# Altium PCB PCB1.PcbDoc (part 3 of 3)
Units mm, origin at the board's own origin, x right, y up, seen from the top; angles counter-clockwise.
Board outline 93.85 x 63.5 mm, 4 copper layers (Top Layer, Mid Layer 1, Mid Layer 2, Bottom Layer), stack 1.65 mm thick; 77 components, 56 nets, 298 pads, 141 vias.
Unrouted connection lines stored in the file: 1.
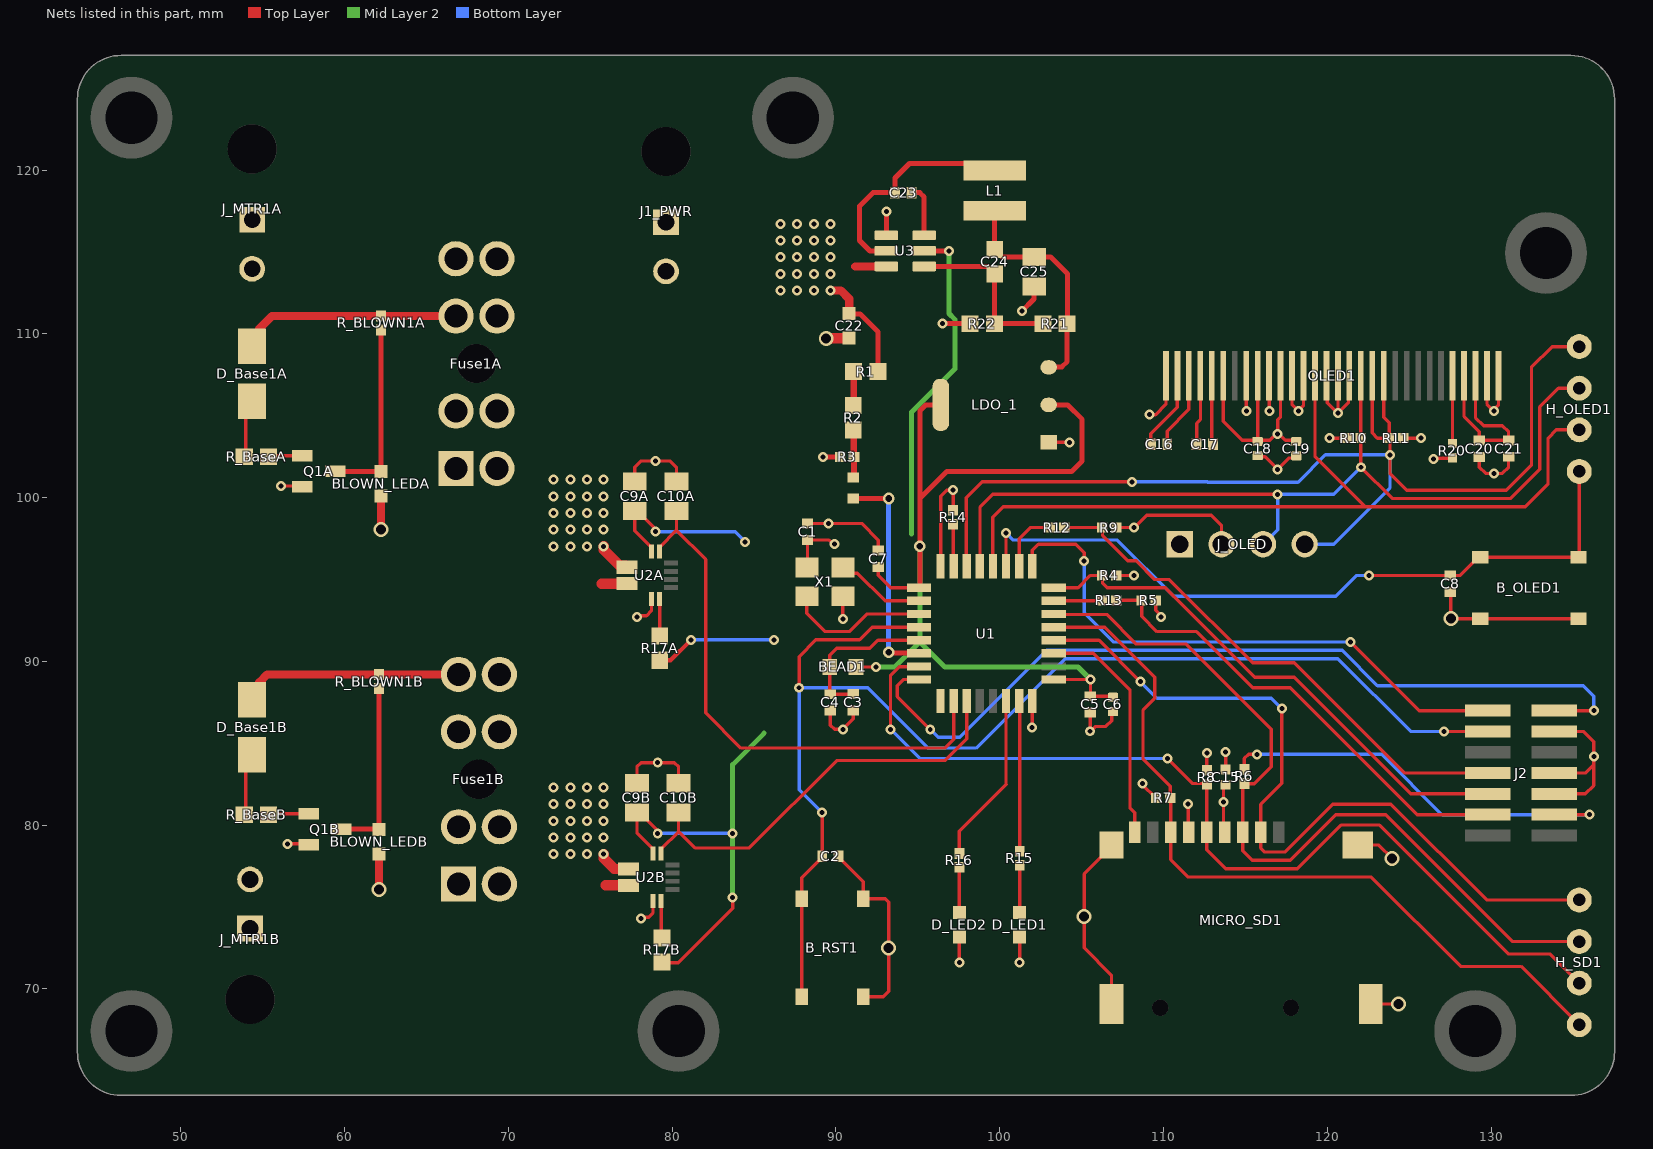
[diagram p4: the nets of this part, all layers, seen from the top]

## Part data (continued)
R17A R17B: library part 0603WAF1001T5E, "Resistor, 1kΩ, ±1%, 100mW, 75V, ±100ppm/℃, -55℃~+155℃, SMD 0603", JLCPCB Basic Part=Yes, JLCPCB Part Number=C21190, Manufacturer=Uniroyal, Package Size=0603, Power Rating=100mW, Resistance=1kΩ, Temperature Coefficient=±100ppm/℃, Temperature Rating=-55℃~+155℃, Tolerance=±1%, Voltage Rating=75V, Category=Resistors, ComponentLink1Description=Datasheet, ComponentLink1URL=https://wmsc.lcsc.com/wmsc/upload/file/pdf/v2/lcsc/2206010130_UNI-ROYAL-Uniroyal-Elec-0603WAF1001T5E_C21190.pdf, ComponentLink2Description="JLCPCB Part URL", ComponentLink2URL=https://jlcpcb.com/partdetail/C21190, Manufacturer Part Number=0603WAF1001T5E, Supplier 1=LCSC, Supplier Part Number 1=C21190
R20: library part 0402WGF3903TCE, "390k Resistor", JLCPCB Part Class="Extended Part", LCSC Part Name="390kΩ ±1% 62.5mW 厚膜电阻", Manufacturer=UNI-ROYAL(厚声), Operating Temperature Range=-55℃~+155℃, Temperature Coefficient=±100ppm/℃, Tolerance=±1%, Add into BOM=yes, Convert to PCB=yes, Datasheet=https://atta.szlcsc.com/upload/public/pdf/source/20200306/C422600_1E6D84923E4A46A82E41ADD87F860B5C.pdf, Device=0402WGF3903TCE, Manufacturer Part=0402WGF3903TCE, Supplier=LCSC, Supplier Footprint=0402, Supplier Part=C25782, Symbol=0402WGF3903TCE, Type="Thick Film Resistors"
R21: "100 kOhms Â±1% 0.1W, 1/10W Chip Resistor 0603 (1608 Metric) Moisture Resistant Thick Film", Package="0603 Yageo", Check_prices=https://www.snapeda.com/parts/RC0603FR-07100KL/Yageo/view-part/?ref=eda, MF=Yageo, MP=RC0603FR-07100KL, SnapEDA_Link=https://www.snapeda.com/parts/RC0603FR-07100KL/Yageo/view-part/?ref=snap
R22: "Resistor, 13kΩ, ±1%, 100mW, 75V, ±100ppm/℃, -55℃~+155℃, SMD 0603", JLCPCB Basic Part=Yes, JLCPCB Part Number=C22797, Manufacturer=Uniroyal, Package Size=0603, Power Rating=100mW, Resistance=13kΩ, Temperature Coefficient=±100ppm/℃, Temperature Rating=-55℃~+155℃, Tolerance=±1%, Voltage Rating=75V, Category=Resistors, ComponentLink1Description=Datasheet, ComponentLink1URL=https://wmsc.lcsc.com/wmsc/upload/file/pdf/v2/lcsc/2206010130_UNI-ROYAL-Uniroyal-Elec-0603WAF1302T5E_C22797.pdf, ComponentLink2Description="JLCPCB Part URL", ComponentLink2URL=https://jlcpcb.com/partdetail/C22797, Manufacturer Part Number=0603WAF1302T5E, Supplier 1=LCSC, Supplier Part Number 1=C22797
R_BaseA R_BaseB: "Resistor, 10kΩ, ±1%, 100mW, 75V, ±100ppm/℃, -55℃~+155℃, SMD 0603", JLCPCB Basic Part=Yes, JLCPCB Part Number=C25804, Manufacturer=Uniroyal, Package Size=0603, Power Rating=100mW, Resistance=10kΩ, Temperature Coefficient=±100ppm/℃, Temperature Rating=-55℃~+155℃, Tolerance=±1%, Voltage Rating=75V, Category=Resistors, ComponentLink1Description=Datasheet, ComponentLink1URL=https://wmsc.lcsc.com/wmsc/upload/file/pdf/v2/lcsc/2206010045_UNI-ROYAL-Uniroyal-Elec-0603WAF1002T5E_C25804.pdf, ComponentLink2Description="JLCPCB Part URL", ComponentLink2URL=https://jlcpcb.com/partdetail/C25804, Manufacturer Part Number=0603WAF1002T5E, Supplier 1=LCSC, Supplier Part Number 1=C25804
R_BLOWN1A R_BLOWN1B: "Resistor, 12kΩ, ±1%, 62.5mW, 50V, ±100ppm/℃, -55℃~+155℃, SMD 0402", JLCPCB Basic Part=Yes, JLCPCB Part Number=C25752, Manufacturer=Uniroyal, Package Size=0402, Power Rating=62.5mW, Resistance=12kΩ, Temperature Coefficient=±100ppm/℃, Temperature Rating=-55℃~+155℃, Tolerance=±1%, Voltage Rating=50V, Category=Resistors, ComponentLink1Description=Datasheet, ComponentLink1URL=https://wmsc.lcsc.com/wmsc/upload/file/pdf/v2/lcsc/2206010100_UNI-ROYAL-Uniroyal-Elec-0402WGF1202TCE_C25752.pdf, ComponentLink2Description="JLCPCB Part URL", ComponentLink2URL=https://jlcpcb.com/partdetail/C25752, Manufacturer Part Number=0402WGF1202TCE, Supplier 1=LCSC, Supplier Part Number 1=C25752
U1: "No Description Available", Mfr_Name=STMicroelectronics, RefDes=RefDes, Type=Type
U2A U2B: "Current Sensor 15.5A 1 Channel Hall Effect, Open Loop Bidirectional 12-PowerWFQFN", Package="PowerWFQFN-12 Allegro MicroSystems LLC", Check_prices=https://www.snapeda.com/parts/ACS711KEXLT-15AB-T/Allegro/view-part/?ref=eda, MF="Allegro MicroSystems LLC", MP=ACS711KEXLT-15AB-T, SnapEDA_Link=https://www.snapeda.com/parts/ACS711KEXLT-15AB-T/Allegro/view-part/?ref=snap
U3: "4.5V to 17V Input, 1A Synchronous Step-Down Voltage Regulator in 6-pin SOT-23", Package="SOT-23-THN-6 Texas Instruments", Check_prices=https://www.snapeda.com/parts/TPS561201DDCT/Texas+Instruments/view-part/?ref=eda, MF="Texas Instruments", MP=TPS561201DDCT, SnapEDA_Link=https://www.snapeda.com/parts/TPS561201DDCT/Texas+Instruments/view-part/?ref=snap
X1: library part SX3M32.768KM20F30TNN, Current - Supply=90uA, Frequency Stability=±30ppm, JLCPCB Part Class="Extended Part", LCSC Part Name="32.768kHz ±20ppm 1.62V~3.63V CMOS", Manufacturer=SCTF(星通时频), Normal temperature Frequency Tolerance=±20ppm, Operating Temperature=-40℃~+85℃, Voltage - Supply=1.62V~3.63V, Add into BOM=yes, Convert to PCB=yes, Datasheet=https://atta.szlcsc.com/upload/public/pdf/source/20240605/38A6F081BC26201D4BADAAB4D2EED01C.pdf, Device=SX3M32.768KM20F30TNN, Manufacturer Part=SX3M32.768KM20F30TNN, Output Type=CMOS, Supplier=LCSC, Supplier Footprint=SMD3225-4P, Supplier Part=C2901582, Symbol=SX3M32.768KM20F30TNN

## Free pads (board coordinates)
  rect 0.7x0.6 smd: 3(91.059,99.949) 3(91.059,101.219)
  round 5 hole 3.2 unplated paste-2539.97 mask+0: 4(46.99,67.437) 4(46.99,123.19) 4(80.391,67.437) 4(87.376,123.19) 4(129.032,67.437) 4(133.35,114.935)

## Via types
v1: diameter 0.61, hole 0.305, Top Layer to Bottom Layer, 130 vias
v2: diameter 0.914, hole 0.61, Top Layer to Bottom Layer, 8 vias
v3: diameter 0.711, hole 0.406, Top Layer to Bottom Layer, 3 vias

## Nets (pads, with @x,y where several pads share a name; then routed paths per layer and width w, separated by ;. In a path a pad name is that pad's centre, name@x,y a point inside that pad or via, vN(x,y) a via of type N, cw(c..) or ccw(c..) an arc to the next point about the centre after c; other vN are vias at no path point)
3V3: C1.2 C9A.2 C9B.2 C15.1 C18.2 C19.2 J2.3 J_OLED.2 MICRO_SD1.4 OLED1.6 OLED1.9 OLED1.11 R4.2 R5.2 R6.2 R7.2 R8.2 R9.2 R10.2 R11.2 R17A.2 R17B.2 U2A.12 U2B.12 U3.5 X1.4 | length 126.8
  Top Layer w0.203: U2A.12@78.736,96.7 78.736,96.975 77.724,97.987 C9A.2@77.724,99.176 77.899,99.176 78.916,98.159 78.916,97.995 v1(78.994,97.917) ; U2B.12@78.828,78.277 78.828,78.552 77.851,79.529 C9B.2@77.851,80.761 78.026,80.761 79.043,79.744 79.043,79.58 v1(79.121,79.502) ; R17B.2@79.609,71.608 80.371,71.608 83.693,74.93 v1(83.693,75.59) ; X1.4@88.224,95.73 88.265,95.771 C1.2@88.265,97.417 ; C1.2@88.269,97.413 89.548,97.413 89.806,97.155 v1(89.916,97.155) ; R4.2@107.105,95.25 v1(108.204,95.25) ; R9.2@107.105,98.171 v1(108.204,98.171) 108.966,98.933 112.911,98.933 113.538,98.306 J_OLED.2@113.538,97.155 ; v1(108.712,82.55) 108.712,82.481 109.532,81.661 R7.2@109.557,81.661 ; R5.2@109.518,93.726 109.518,93.121 109.855,92.784 v1(109.855,92.71) ; R8.2@112.649,83.356 v1(112.649,84.397) ; OLED1.6@113.647,107.442 113.647,104.666 114.816,103.497 115.745,103.497 116.486,103.497 116.867,103.878 v1(116.967,103.878) ; MICRO_SD1.4@113.738,79.564 113.665,79.637 113.665,82.344 C15.1@113.792,82.471 ; R6.2@114.935,83.4 114.935,84.074 115.189,84.328 v1(115.697,84.328) ; C18.2@115.747,103.499 OLED1.9@115.747,107.442 ; OLED1.11@117.147,107.442 117.147,104.938 116.967,104.758 v1(116.967,103.878) ; C19.2@118.11,103.489 118.106,103.493 117.444,103.493 117.059,103.878 v1(116.967,103.878) ; v1(120.142,103.632) R10.2@121.197,103.632 ; R11.2@124.631,103.632 v1(125.73,103.632) ; J2.3@133.861,80.645 v1(136.017,80.645)
  Top Layer w0.254: R17A.2@79.248,90.07 79.91,90.07 v1(81.153,91.313)
  Top Layer w0.305: U3.5@95.389,115.062 v1(96.901,115.062)
  Mid Layer 2 w0.305: v1(83.693,75.59) v1(83.693,79.502) 83.693,83.693 85.619,85.619 ; 94.615,97.79 94.615,105.214 97.257,107.856 97.257,110.884 96.901,111.24 v1(96.901,115.062)
  Bottom Layer w0.203: v1(78.994,97.917) 83.847,97.917 84.455,97.309 v1(84.455,97.282) ; v1(79.121,79.502) v1(83.693,79.502) ; v1(81.153,91.313) v1(86.233,91.313) ; v1(115.697,84.328) 123.317,84.328 127,80.645 v1(136.017,80.645)
  other v1: 113.665,81.407
26V1: C22.2 J1_PWR.1 R1.2 U2A.1 U2B.1 U3.3 | length 12.9
  Top Layer w0.305: C22.2@90.805,111.24 90.837,111.208 91.484,111.208 92.583,110.109 R1.2@92.583,107.696
  Top Layer w0.508: v1(89.662,112.649) 90.297,112.649 90.805,112.141 C22.2@90.805,111.24 ; 91.186,114.112 U3.3@93.079,114.112 U3.3@93.084,114.112
  Top Layer w0.635: v1(75.819,78.232) 75.819,77.978 76.47,77.327 U2B.1@77.343,77.327 ; v1(75.819,97.028) 75.819,96.809 76.796,95.833 77.168,95.833 U2A.1@77.251,95.75
  other v1: 72.771,78.232 73.787,78.232 74.803,78.232 72.771,79.248 73.787,79.248 74.803,79.248 75.819,79.248 72.771,80.264 73.787,80.264 74.803,80.264 75.819,80.264 72.771,81.28 73.787,81.28 74.803,81.28 75.819,81.28 72.771,82.296 73.787,82.296 74.803,82.296 75.819,82.296 72.771,97.028 73.787,97.028 74.803,97.028 72.771,98.044 73.787,98.044 74.803,98.044 75.819,98.044 72.771,99.06 73.787,99.06 74.803,99.06 75.819,99.06 72.771,100.076 73.787,100.076 74.803,100.076 75.819,100.076 72.771,101.092 73.787,101.092 74.803,101.092 75.819,101.092 86.614,112.649 87.63,112.649 88.646,112.649 86.614,113.665 87.63,113.665 88.646,113.665 89.662,113.665 86.614,114.681 87.63,114.681 88.646,114.681 89.662,114.681 86.614,115.697 87.63,115.697 88.646,115.697 89.662,115.697 86.614,116.713 87.63,116.713 88.646,116.713 89.662,116.713
\C\S\: H_SD1.4 MICRO_SD1.2 U1.20 | length 47.9
  Top Layer w0.203: U1.20@103.302,91.294 106.064,91.294 v1(108.585,88.773) ; v1(117.221,87.122) 117.221,82.55 115.938,81.267 MICRO_SD1.2@115.938,79.564 115.938,78.605 116.184,78.359 117.408,78.359 120.329,81.28 123.885,81.28 129.727,75.438 H_SD1.4@135.382,75.438
  Bottom Layer w0.203: v1(108.585,88.773) 109.601,87.757 116.586,87.757 v1(117.221,87.122)
ADC1_IN8: U1.9
AVDD: BEAD1.2 C3.2 C4.2 U1.5 | length 9.6
  Top Layer w0.203: C3.2@91.059,88.003 91.055,87.999 89.666,87.999 C4.2@89.662,87.995 89.624,88.033 BEAD1.2@89.624,89.662 89.624,90.386 90.043,90.805 92.075,90.805 92.564,91.294 U1.5@95.072,91.294
BOOT0: R14.2 U1.31 | length 2.6
  Top Layer w0.203: R14.2@97.155,98.381 97.155,95.841 U1.31@97.187,95.809
CardDetect: MICRO_SD1.CD1 U1.19 | length 14.4
  Top Layer w0.203: U1.19@103.302,90.494 105.721,90.494 107.95,88.265 107.95,81.06 108.238,80.772 MICRO_SD1.CD1@108.238,79.564
GND: B_OLED1.C1 B_OLED1.D1 B_RST1.C1 B_RST1.D1 BLOWN_LEDA.C BLOWN_LEDB.C C1.1 C2.1 C3.1 C4.1 C5.1 C6.1 C7.1 C8.1 C9A.1 C9B.1 C10A.1 C10B.1 C15.2 C18.1 C19.1 C20.1 C21.1 C22.1 C25.1 D_LED1.C D_LED2.C J1_PWR.2 J2.5 J2.7 J2.11 J_MTR1A.2 J_MTR1B.2 J_OLED.1 LDO_1.1 MICRO_SD1.6 MICRO_SD1.MP1 MICRO_SD1.MP2 MICRO_SD1.MP3 MICRO_SD1.MP4 OLED1.1 OLED1.8 OLED1.10 OLED1.12 OLED1.13 OLED1.15 OLED1.16 OLED1.17 OLED1.29 OLED1.30 Q1A.2 Q1B.2 R3.1 R14.1 R20.1 R22.1 U1.16 U1.32 U2A.5 U2B.5 U3.1 X1.2 | length 133.7
  Top Layer w0.203: v1(56.134,100.711) 57.359,100.711 Q1A.2@57.42,100.65 ; v1(56.515,78.867) 57.278,78.867 57.293,78.882 Q1B.2@57.293,78.933 ; C9A.1@77.724,100.976 77.724,101.854 78.107,102.237 78.484,102.237 78.486,102.235 v1(78.994,102.235) 79.883,102.235 80.264,101.854 C10A.1@80.264,100.976 ; C9B.1@77.851,82.561 77.851,83.566 78.105,83.82 v1(79.121,83.82) 80.137,83.82 80.391,83.566 C10B.1@80.391,82.561 ; v1(77.851,92.71) 77.929,92.788 78.437,92.788 78.736,93.087 U2A.5@78.736,93.8 ; v1(78.105,74.295) 78.183,74.373 78.564,74.373 78.828,74.637 U2B.5@78.828,75.377 ; C1.1@88.265,98.417 88.269,98.421 89.531,98.421 v1(89.535,98.425) 91.567,98.425 92.583,97.409 C7.1@92.583,96.766 ; C4.1@89.662,86.995 89.662,86.106 89.916,85.852 v1(90.424,85.852) 91.059,86.487 C3.1@91.059,87.003 ; C2.1@90.162,78.105 90.162,78.055 91.664,76.553 B_RST1.D1@91.664,75.517 93.012,75.517 93.218,75.311 v2(93.218,72.517) 93.218,69.85 92.885,69.517 B_RST1.C1@91.664,69.517 ; v1(90.424,92.583) X1.2@90.424,93.98 ; U1.32@96.387,95.809 96.393,95.815 96.393,100.076 96.76,100.443 97.141,100.443 v1(97.155,100.457) R14.1@97.155,99.231 ; v1(97.536,71.628) D_LED2.C@97.536,73.164 ; v1(101.219,71.628) D_LED1.C@101.219,73.164 ; v1(101.981,85.979) 101.984,85.982 101.984,87.576 U1.16@101.987,87.579 ; C25.1@102.097,112.903 C25.1@102.108,112.892 ; LDO_1.1@102.99,103.374 102.994,103.378 v1(104.267,103.378) ; C5.1@105.526,86.861 v1(105.526,85.736) 105.557,85.736 105.848,86.027 106.474,86.027 106.833,86.386 106.833,86.794 C6.1@106.912,86.872 ; MICRO_SD1.MP2@106.819,69.09 106.819,70.854 105.156,72.517 v2(105.156,74.422) 105.156,77.025 MICRO_SD1.MP1@106.896,78.765 ; v1(109.13,105.066) 109.511,105.066 110.147,105.702 OLED1.1@110.147,107.444 ; v1(111.506,81.28) 111.506,79.596 MICRO_SD1.6@111.538,79.564 ; C15.2@113.792,83.391 v1(113.792,84.455) ; OLED1.8@115.047,107.442 115.055,107.435 115.055,105.29 v1(115.062,105.283) ; C18.1@115.745,102.497 115.748,102.494 116.2,102.494 v1(116.967,101.727) 117.655,102.415 118.036,102.415 C19.1@118.11,102.489 ; OLED1.10@116.447,107.442 116.453,107.436 116.453,105.289 v1(116.459,105.283) ; OLED1.12@117.847,107.442 117.847,105.673 v1(118.237,105.283) 118.237,105.327 118.547,105.637 OLED1.13@118.547,107.442 ; OLED1.15@119.947,107.442 120.005,107.384 120.005,105.801 v1@120.648,105.158 ; OLED1.16@120.647,107.442 120.648,107.44 v1@120.648,105.158 ; OLED1.17@121.347,107.442 121.292,107.387 121.292,105.798 v1(120.65,105.156) v1@120.648,105.158 ; MICRO_SD1.MP4@121.869,78.79 123.14,78.79 v2(123.952,77.978) ; MICRO_SD1.MP3@122.646,69.088 v2(124.333,69.088) ; v1(126.492,102.362) 126.53,102.4 127.597,102.4 R20.1@127.635,102.437 ; C8.1@127.508,94.242 127.538,94.212 v2(127.538,92.613) B_OLED1.C1@129.334,92.613 B_OLED1.D1@135.334,92.613 B_OLED1.D1@135.382,92.613 ; C20.1@129.286,102.489 129.286,101.854 129.667,101.473 v1(130.175,101.473) 130.683,101.473 131.064,101.854 C21.1@131.064,102.497 ; OLED1.29@129.747,107.439 129.747,105.711 v1(130.175,105.283) 130.175,105.363 130.447,105.635 OLED1.30@130.447,107.439 ; J2.5@133.861,81.915 135.763,81.915 136.271,82.423 136.271,83.693 ; J2.7@133.861,83.185 135.763,83.185 136.271,83.693 ; J2.11@133.861,85.725 135.636,85.725 136.271,85.09 v1(136.271,84.201) 136.271,83.693
  Top Layer w0.254: U3.1@93.079,116.012 U3.1@93.091,116.024
  Top Layer w0.305: v1(89.198,102.489) R3.1@90.253,102.489 ; U3.1@93.091,116.024 v1(93.091,117.475) ; v1(96.52,110.617) R22.1@98.198,110.617 ; v1(101.346,111.379) 102.097,112.13 C25.1@102.097,112.903
  Top Layer w0.508: v2(62.103,76.073) BLOWN_LEDB.C@62.103,78.232 ; v2(62.23,98.044) BLOWN_LEDA.C@62.23,100.088
  Top Layer w0.635: v2(89.408,109.728) 89.414,109.734 90.799,109.734 C22.1@90.805,109.74
I2C1_SCL: H_OLED1.2 J_OLED.3 OLED1.18 R10.1 U1.29 | length 56
  Top Layer w0.203: U1.29@98.787,95.809 98.797,95.818 98.797,99.432 99.568,100.203 v1(116.967,100.203) ; OLED1.18@122.047,107.442 R10.1@122.047,103.632 v1(122.047,101.854) 123.952,99.949 131.191,99.949 132.969,101.727 132.969,105.537 134.112,106.68 H_OLED1.2@135.382,106.68
  Bottom Layer w0.203: J_OLED.3@116.078,97.155 116.967,98.044 v1(116.967,100.203) 120.396,100.203 v1(122.047,101.854)
I2C1_SDA: H_OLED1.1 J_OLED.4 OLED1.19 OLED1.20 R11.1 U1.30 | length 69.7
  Top Layer w0.203: U1.30@97.987,95.809 97.952,95.844 97.952,99.984 98.933,100.965 v1(108.077,100.965) ; OLED1.19@122.747,107.442 122.747,103.948 123.063,103.632 R11.1@123.781,103.632 ; OLED1.20@123.447,107.442 123.447,104.905 123.444,104.902 123.781,104.565 R11.1@123.781,103.632 ; H_OLED1.1@135.382,109.22 133.731,109.22 132.461,107.95 132.461,101.981 130.937,100.457 124.841,100.457 123.825,101.473 v1(123.825,102.616) 123.825,103.588 R11.1@123.781,103.632
  Bottom Layer w0.203: v1(108.077,100.965) 112.676,100.965 112.702,100.94 118.212,100.94 119.888,102.616 123.747,102.616 v1(123.825,102.616) 123.825,100.584 120.396,97.155 J_OLED.4@118.618,97.155
LED1: R15.1 U1.15 | length 9.2
  Top Layer w0.203: U1.15@101.187,87.579 101.219,87.547 R15.1@101.219,78.403
LED2: R16.1 U1.14 | length 10.5
  Top Layer w0.203: R16.1@97.536,78.276 97.536,79.629 100.393,82.486 100.387,82.493 U1.14@100.387,87.579
LSE_EN: U1.3 X1.1 | length 8.8
  Top Layer w0.203: X1.1@88.224,93.98 88.224,92.942 89.345,91.821 90.805,91.821 91.878,92.894 U1.3@95.072,92.894
LSE_Out: U1.2 X1.3 | length 5.5
  Top Layer w0.203: X1.3@90.424,95.73 90.774,95.38 91.31,95.38 92.996,93.694 U1.2@95.072,93.694
MCU_VCP_RX: J2.14 U1.25 | length 35.3
  Top Layer w0.203: U1.25@101.987,95.809 101.987,96.78 102.362,97.155 104.648,97.155 105.156,96.647 v1(105.156,96.139) ; v1(121.412,91.186) 125.603,86.995 J2.14@129.791,86.995
  Bottom Layer w0.203: v1(105.156,96.139) 105.156,92.964 106.934,91.186 v1(121.412,91.186)
MCU_VCP_TX: J2.13 U1.8 | length 52.4
  Top Layer w0.203: U1.8@95.072,88.894 94.101,88.894 93.734,88.527 93.734,87.853 95.736,85.852 v1(95.758,85.852) ; J2.13@133.861,86.995 v1(136.271,86.995)
  Bottom Layer w0.203: v1(95.758,85.852) 96.241,85.369 97.561,85.369 102.87,90.678 120.904,90.678 123.063,88.519 135.636,88.519 136.271,87.884 v1(136.271,86.995)
NetBLOWN_LEDA_A: BLOWN_LEDA.A Q1A.3 R_BLOWN1A.1 | length 11.5
  Top Layer w0.203: BLOWN_LEDA.A@62.218,101.6 BLOWN_LEDA.A@62.23,101.588
  Top Layer w0.305: Q1A.3@59.42,101.6 BLOWN_LEDA.A@62.218,101.6 ; BLOWN_LEDA.A@62.23,101.588 R_BLOWN1A.1@62.23,110.236
NetBLOWN_LEDB_A: BLOWN_LEDB.A Q1B.3 R_BLOWN1B.1 | length 10.9
  Top Layer w0.305: Q1B.3@59.801,79.756 BLOWN_LEDB.A@62.079,79.756 ; BLOWN_LEDB.A@62.103,79.732 R_BLOWN1B.1@62.103,88.348
NetC16_1: C16.1 OLED1.3 | length 4.7
  Top Layer w0.203: C16.1@110.228,103.251 110.228,104.063 111.547,105.382 OLED1.3@111.547,107.442
NetC16_2: C16.2 OLED1.2 | length 4.9
  Top Layer w0.203: C16.2@109.228,103.251 109.228,103.894 110.847,105.513 OLED1.2@110.847,107.442
NetC17_1: C17.1 OLED1.5 | length 4.2
  Top Layer w0.203: OLED1.5@112.947,107.442 112.947,103.326 C17.1@113.022,103.251
NetC17_2: C17.2 OLED1.4 | length 4.3
  Top Layer w0.203: C17.2@112.022,103.251 112.022,104.529 112.257,104.764 112.257,107.431 OLED1.4@112.247,107.442
NetC20_2: C20.2 C21.2 OLED1.27 OLED1.28 | length 11.5
  Top Layer w0.203: OLED1.27@128.347,107.442 128.347,104.952 129.286,104.013 C20.2@129.286,103.489 129.29,103.493 C21.2@131.01,103.493 ; OLED1.28@129.047,107.44 129.047,104.887 129.54,104.394 130.683,104.394 131.064,104.013 C21.2@131.064,103.497
NetC23_1: C23.1 U3.6 | length 3.2
  Top Layer w0.305: C23.1@94.607,118.618 95.123,118.618 95.389,118.352 95.389,117.717 U3.6@95.389,116.012
NetC23_2: C23.2 L1.1 U3.2 | length 14
  Top Layer w0.203: L1.1@99.269,120.396 L1.1@99.695,119.97
  Top Layer w0.305: U3.2@93.079,115.062 92.075,115.062 91.44,115.697 91.44,117.79 92.268,118.618 C23.2@93.607,118.618 93.607,119.515 94.488,120.396 L1.1@99.269,120.396
NetC24_1: C24.1 R21.1 R22.2 U3.4 | length 10.5
  Top Layer w0.305: U3.4@95.389,114.112 99.258,114.112 C24.1@99.695,113.675 ; R22.2@99.668,110.617 R22.2@99.695,110.617 ; C24.1@99.695,113.65 R22.2@99.695,110.617 ; R21.1@102.643,110.617 R22.2@99.695,110.617
  Top Layer w0.381: C24.1@99.695,113.65 C24.1@99.695,113.675
NetC24_2: C24.2 C25.2 L1.2 LDO_1.3 R21.2 | length 14.1
  Top Layer w0.203: LDO_1.3@102.99,107.954 LDO_1.3@103.021,107.985 ; R21.2@104.113,110.617 R21.2@104.14,110.644
  Top Layer w0.305: L1.2@99.695,117.52 99.695,115.125 100.043,114.777 100.068,114.777 100.164,114.681 C25.2@102.108,114.681 ; C25.2@102.108,114.692 103.113,114.692 104.14,113.665 R21.2@104.14,110.644 ; LDO_1.3@103.021,107.985 103.794,107.985 104.113,108.304 R21.2@104.113,110.617
NetD_Base1A_1: D_Base1A.1 R_BaseA.2 | length 3.6
  Top Layer w0.203: R_BaseA.2@53.975,102.489 53.975,105.512 D_Base1A.1@54.356,105.893
NetD_Base1A_2: D_Base1A.2 Fuse1A.2 J_MTR1A.1 R_BLOWN1A.2 | length 13.6
  Top Layer w0.508: D_Base1A.2@54.356,109.245 54.8,109.69 54.8,110.311 55.575,111.086 R_BLOWN1A.2@62.23,111.086 ; R_BLOWN1A.2@62.233,111.083 Fuse1A.2@66.802,111.083
NetD_Base1B_1: D_Base1B.1 R_BaseB.2 | length 3.8
  Top Layer w0.203: R_BaseB.2@53.975,80.645 53.975,83.922 D_Base1B.1@54.356,84.303
NetD_Base1B_2: D_Base1B.2 Fuse1B.2 J_MTR1B.1 R_BLOWN1B.2 | length 13.6
  Top Layer w0.508: D_Base1B.2@54.356,87.655 54.8,88.1 54.8,88.721 55.277,89.198 Fuse1B.2@66.943,89.198
NetD_LED1_A: D_LED1.A R15.2 | length 2.9
  Top Layer w0.203: D_LED1.A@101.219,74.664 R15.2@101.219,77.553
NetD_LED2_A: D_LED2.A R16.2 | length 2.8
  Top Layer w0.203: D_LED2.A@97.536,74.664 R16.2@97.536,77.426
NetOLED1_26: OLED1.26 R20.2 | length 4.1
  Top Layer w0.203: R20.2@127.647,103.303 OLED1.26@127.647,107.442
NetQ1A_1: Q1A.1 R_BaseA.1 | length 2.1
  Top Layer w0.203: R_BaseA.1@55.345,102.55 Q1A.1@57.42,102.55
NetQ1B_1: Q1B.1 R_BaseB.1 | length 2.5
  Top Layer w0.203: R_BaseB.1@55.345,80.706 Q1B.1@57.801,80.706
NetR1_1: R1.1 R2.2 | length 1.9
  Top Layer w0.381: R2.2@91.059,105.61 91.086,105.637 91.086,107.415 R1.1@91.113,107.442
NetR12_1: R12.1 U1.26 | length 3.9
  Top Layer w0.203: U1.26@101.187,95.809 101.187,97.504 101.854,98.171 R12.1@103.08,98.171
NetR13_2: R13.2 U1.23 | length 3
  Top Layer w0.203: U1.23@103.302,93.694 103.318,93.71 106.239,93.71 R13.2@106.255,93.726
NetR17A_1: R17A.1 U2A.6 | length 2.2
  Top Layer w0.203: R17A.1@79.248,91.54 U2A.6@79.248,93.788
NetR17B_1: R17B.1 U2B.6 | length 2.3
  Top Layer w0.203: R17B.1@79.328,73.125 U2B.6@79.328,75.377
NRST: B_RST1.A1 B_RST1.B1 C2.2 J2.12 U1.4 | length 77.6
  Top Layer w0.203: v1(87.757,88.392) 87.757,90.297 88.773,91.313 91.44,91.313 92.211,92.084 95.063,92.084 U1.4@95.072,92.094 ; B_RST1.A1@87.914,69.517 B_RST1.B1@87.914,75.517 87.914,76.807 C2.2@89.162,78.055 ; v1(89.154,80.772) 89.158,80.768 89.158,78.109 C2.2@89.162,78.105 ; v1(127.127,85.725) J2.12@129.791,85.725
  Bottom Layer w0.203: v1(89.154,80.772) 87.757,82.169 v1(87.757,88.392) 91.948,88.392 95.631,84.709 98.552,84.709 104.013,90.17 120.65,90.17 125.095,85.725 v1(127.127,85.725)
OLED_NRST: H_OLED1.3 OLED1.14 U1.28 | length 51.9
  Top Layer w0.203: U1.28@99.587,95.809 99.577,95.818 99.577,98.797 99.568,98.806 100.203,99.441 122.301,99.441 ; OLED1.14@119.247,107.442 119.25,107.439 119.25,102.492 122.301,99.441 ; H_OLED1.3@135.382,104.14 133.985,104.14 133.477,103.632 133.477,100.838 132.08,99.441 122.301,99.441
OLED_TOGGLE: B_OLED1.A1 B_OLED1.B1 C8.2 H_OLED1.4 U1.27 | length 44.8
  Top Layer w0.203: U1.27@100.387,95.809 v1(100.387,97.847) ; v1@122.559,95.246 127.504,95.246 C8.2@127.508,95.242 128.088,95.242 129.209,96.363 B_OLED1.A1@129.334,96.363 B_OLED1.B1@135.334,96.363 135.382,96.411 H_OLED1.4@135.382,101.6
  Bottom Layer w0.203: v1(100.387,97.847) 100.825,97.409 107.188,97.409 110.617,93.98 120.523,93.98 121.793,95.25 v1(122.555,95.25)
OPAMP1_VINP: pad.3 R2.1 R3.2 U1.6 | length 16.4
  Top Layer w0.203: U1.6@95.044,90.523 U1.6@95.072,90.494
  Top Layer w0.305: pad.3@91.059,99.949 v3(93.218,99.949) ; pad.3@91.059,101.219 pad.3@91.103,101.263 ; v3(93.218,90.551) 93.246,90.523 U1.6@95.044,90.523
  Top Layer w0.381: R2.1@91.059,104.14 91.081,104.118 91.081,102.511 R3.2@91.103,102.489 pad.3@91.103,101.263
  Bottom Layer w0.305: v3(93.218,90.551) v3(93.218,99.949)
SPI1_MISO: H_SD1.1 MICRO_SD1.7 R7.1 U1.21 | length 48.7
  Top Layer w0.203: U1.21@103.302,92.094 106.407,92.094 109.474,89.027 109.474,87.757 108.751,87.034 108.751,84.035 110.407,82.379 R7.1@110.407,81.661 110.438,81.63 MICRO_SD1.7@110.438,79.564 110.438,77.903 111.506,76.835 122.682,76.835 128.143,71.374 131.826,71.374 H_SD1.1@135.382,67.818
SPI1_MOSI: H_SD1.3 MICRO_SD1.3 R6.1 U1.22 | length 49.9
  Top Layer w0.203: U1.22@103.302,92.894 103.33,92.865 106.525,92.865 108.331,91.059 111.379,91.059 116.586,85.852 116.586,83.566 115.545,82.525 R6.1@114.935,82.525 ; R6.1@114.935,82.55 114.838,82.453 MICRO_SD1.3@114.838,79.564 114.838,78.427 115.414,77.851 117.729,77.851 120.523,80.645 123.571,80.645 131.318,72.898 H_SD1.3@135.382,72.898
SPI1_SCK: H_SD1.2 MICRO_SD1.5 R8.1 U1.7 | length 58.3
  Top Layer w0.203: v1(93.345,85.852) 93.328,85.869 93.328,89.137 93.869,89.678 95.056,89.678 U1.7@95.072,89.694 ; v1(110.236,84.074) 111.76,82.55 112.583,82.55 112.638,82.495 MICRO_SD1.5@112.638,79.564 112.638,78.497 113.792,77.343 118.177,77.343 120.587,79.753 120.587,79.763 120.795,79.971 120.805,79.971 120.844,80.01 123.19,80.01 131.064,72.136 133.604,72.136 H_SD1.2@135.382,70.358
  Bottom Layer w0.203: v1(93.345,85.852) 95.123,84.074 v1(110.236,84.074)
STM_Vdd: BEAD1.1 C5.2 C6.2 C7.2 LDO_1.2 LDO_1.4 U1.1 U1.17 | length 57.8
  Top Layer w0.203: BEAD1.1@91.224,89.662 v1(92.456,89.662) ; C7.2@92.583,95.766 92.583,95.25 93.339,94.494 U1.1@95.072,94.494 U1.1@95.123,94.545 ; U1.17@103.302,88.894 103.305,88.897 105.534,88.897 v1(105.537,88.9) 105.537,87.944 C5.2@105.465,87.872 ; C5.2@105.515,87.872 C6.2@106.912,87.872
  Top Layer w0.305: U1.1@95.123,94.545 v3(95.123,97.028) 95.123,99.949 ; LDO_1.4@96.4,105.664 95.504,105.664 95.123,105.283 95.123,99.949 ; LDO_1.2@102.99,105.664 104.14,105.664 105.029,104.775 105.029,102.235 104.394,101.6 96.774,101.6 95.123,99.949
  Mid Layer 2 w0.305: v1(92.456,89.662) 93.599,89.662 95.123,91.186 ; v3(95.123,97.028) 95.123,91.186 ; v1(105.537,88.9) 104.775,89.662 96.647,89.662 95.123,91.186
SWCLK: J2.6 R4.1 U1.24 | length 32.6
  Top Layer w0.203: U1.24@103.302,94.494 104.781,94.494 105.537,95.25 R4.1@106.23,95.25 ; R4.1@106.255,95.25 R4.1@106.23,95.25 ; J2.6@129.791,81.915 125.095,81.915 117.983,89.027 115.57,89.027 110.109,94.488 106.553,94.488 106.277,94.764 106.277,95.203 R4.1@106.23,95.25
SWDIO: J2.4 R5.1 R13.1 | length 28.7
  Top Layer w0.203: R13.1@107.105,93.726 R5.1@108.668,93.726 108.668,92.754 109.601,91.821 112.014,91.821 115.443,88.392 117.729,88.392 125.476,80.645 J2.4@129.791,80.645
SWO: J2.8 R9.1 R12.2 | length 32.3
  Top Layer w0.203: R12.2@103.93,98.171 R9.1@106.255,98.171 106.277,98.149 106.277,97.685 107.823,96.139 108.331,96.139 109.474,94.996 110.363,94.996 115.443,89.916 117.983,89.916 124.714,83.185 J2.8@129.791,83.185
Vi_motor1: C10A.2 U1.10 U2A.11 | length 33.4
  Top Layer w0.203: U2A.11@79.236,96.7 79.236,96.975 80.264,98.003 ; C10A.2@80.264,99.176 80.264,98.003 ; U1.10@97.187,87.579 97.187,85.249 96.647,84.709 84.201,84.709 82.042,86.868 82.042,96.225 80.264,98.003
Vi_motor2: C10B.2 U1.11 U2B.11 | length 26
  Top Layer w0.203: U2B.11@79.328,78.277 79.328,78.552 80.391,79.615 ; C10B.2@80.391,80.761 80.391,79.615 ; U1.11@97.987,87.579 97.987,85.287 96.647,83.947 90.043,83.947 84.709,78.613 81.393,78.613 80.391,79.615
Vmotor1: Fuse1A.1 U2A.3 | length 1.6
  Top Layer w0.203: U2A.3@77.243,94.742 U2A.3@77.251,94.75
  Top Layer w0.635: 75.692,94.742 U2A.3@77.243,94.742
Vmotor2: Fuse1B.1 U2B.3 | length 1.4
  Top Layer w0.635: 75.946,76.327 U2B.3@77.343,76.327
pads on no net: Fuse1A. Fuse1B. J1_PWR. J2.1 J2.2 J2.9 J2.10 J_MTR1A. J_MTR1B. MICRO_SD1. MICRO_SD1.1 MICRO_SD1.8 OLED1.7 OLED1.21 OLED1.22 OLED1.23 OLED1.24 OLED1.25 U1.12 U1.13 U1.18 U2A.7 U2A.8 U2A.9 U2A.10 U2B.7 U2B.8 U2B.9 U2B.10

## Polygon pours and split planes (outlines as drawn)
26V1 on Top Layer "26V1_L01_P003" (solid, pour order 3): 85.979,117.348 90.196,117.348 90.617,115.004 91.44,114.427 91.44,113.792 90.205,112.014 85.979,112.014
26V1 on Top Layer "26V1_L01_P006" (solid, pour order 6): 72.136,82.804 76.454,82.804 76.454,77.724 72.136,77.724
26V1 on Top Layer "26V1_L01_P005" (solid, pour order 5): 72.009,101.727 76.454,101.727 76.454,96.266 72.009,96.266
NetD_Base1A_2 on Top Layer "NETD_BASE1A_2_L01_P012" (solid, pour order 12): 65.024,116.586 71.12,116.586 71.12,108.966 65.024,108.966
Vmotor1 on Top Layer "VMOTOR1_L01_P007" (solid, pour order 7): 65.024,107.442 71.12,107.442 71.12,96.647 72.644,95.123 76.327,95.123 75.301,93.218 69.508,93.218 65.024,97.104
Vmotor2 on Top Layer "VMOTOR2_L01_P010" (solid, pour order 10): 65.151,74.295 65.151,82.169 71.247,82.169 71.247,77.724 72.263,76.708 76.32,76.708 75.531,74.295
NetD_Base1B_2 on Top Layer "NETD_BASE1B_2_L01_P011" (solid, pour order 11): 65.151,91.186 71.247,91.186 71.247,83.566 65.151,83.566
26V1 on Mid Layer 2 "26V1_L03_P004" (solid, pour order 4): 90.297,117.107 90.297,112.014 83.439,112.014 81.915,110.49 81.788,80.645 78.342,77.597 72.136,77.597 72.136,83.058 76.81,83.058 78.486,84.348 78.486,91.059 78.486,93.218 78.486,96.266 72.009,96.266 72.009,101.854 76.531,101.854 77.873,102.762 77.873,118.11 88.496,118.11
3V3 on Mid Layer 2 "3V3_L03_P023" (solid, pour order 23): 96.774,93.218 98.044,91.694 105.791,91.694 107.528,99.314 115.951,99.314 115.951,104.648 126.619,104.648 126.619,99.09 116.84,93.883 116.84,80.391 107.528,80.391 107.188,87.376 87.63,87.503 87.63,85.344 85.344,85.344 85.344,95.546 83.566,96.583 83.566,98.171 95.905,98.171 96.774,97.13
NetD_Base1B_2 on Mid Layer 2 "NETD_BASE1B_2_L03_P014" (solid, pour order 14): 71.247,91.059 71.247,83.566 59.857,83.566 56.007,80.561 56.007,72.009 52.451,72.009 52.451,82.972 57.594,87.566 64.712,91.059
NetD_Base1A_2 on Mid Layer 2 "NETD_BASE1A_2_L03_P015" (solid, pour order 15): 71,109.093 66.23,109.093 63.674,110.371 55.118,110.49 52.705,112.903 52.705,118.491 56.007,118.491 56.007,114.205 56.769,113.538 62.23,113.538 65.975,116.586 70.987,116.586
GND on Mid Layer 1 "GND_L02_P000" (solid, pour order 0): 43.688,127 137.541,127 137.541,63.5 43.688,63.5

## Silkscreen, mask and mechanical layers (free items; w line width, h text height)
Top Overlay:
  drawing of 140 lines, arcs and shapes, not listed
  text "Autonomous Robotic Vehicle / U of M" at 59.563,119.634 h1.02
  text "TGL  RST  SCL  SDA" at 134.366,100.838 h0.51 r90
  text "SOLDER  / IF <5A  / ONLY!  / ------->" at 82.296,99.949 h1.02
  text "GND  3v3  SCL  SDA" at 110.236,94.869 h0.51
  text "Maverick / _\__/_ / [_•_•_] / /|____|\ / |   |" at 47.943,90.551 h1.02
  text "GND  3v3  SCL  SDA" at 134.112,67.056 h0.51 r90
  text "Power Distro Board  / V1.0" at 59.057,65.151 h1.02
Mechanical 1:
  the board outline again, w0.254

## Text inside footprints (layer, text, board x,y; h text height)
OLED1: Top Overlay "OLED_128X64" at 117.782,124.189 h0.51; Top Overlay "30" at 129.527,109.402 h0.51; Top Overlay "1" at 110.047,109.142 h0.51
U1: Top Overlay "*" at 93.599,95.885 h1.27; Mechanical 13 "*" at 95.745,94.259 h1.27